# Altium PCB PCB1.PcbDoc
Units mil, origin at the board's own origin, x right, y up, seen from the top; angles counter-clockwise.
Board outline 3937.01 x 2755.91 mil, 2 copper layers (Top Layer, Bottom Layer); 62 components, 55 nets, 259 pads, 42 vias.
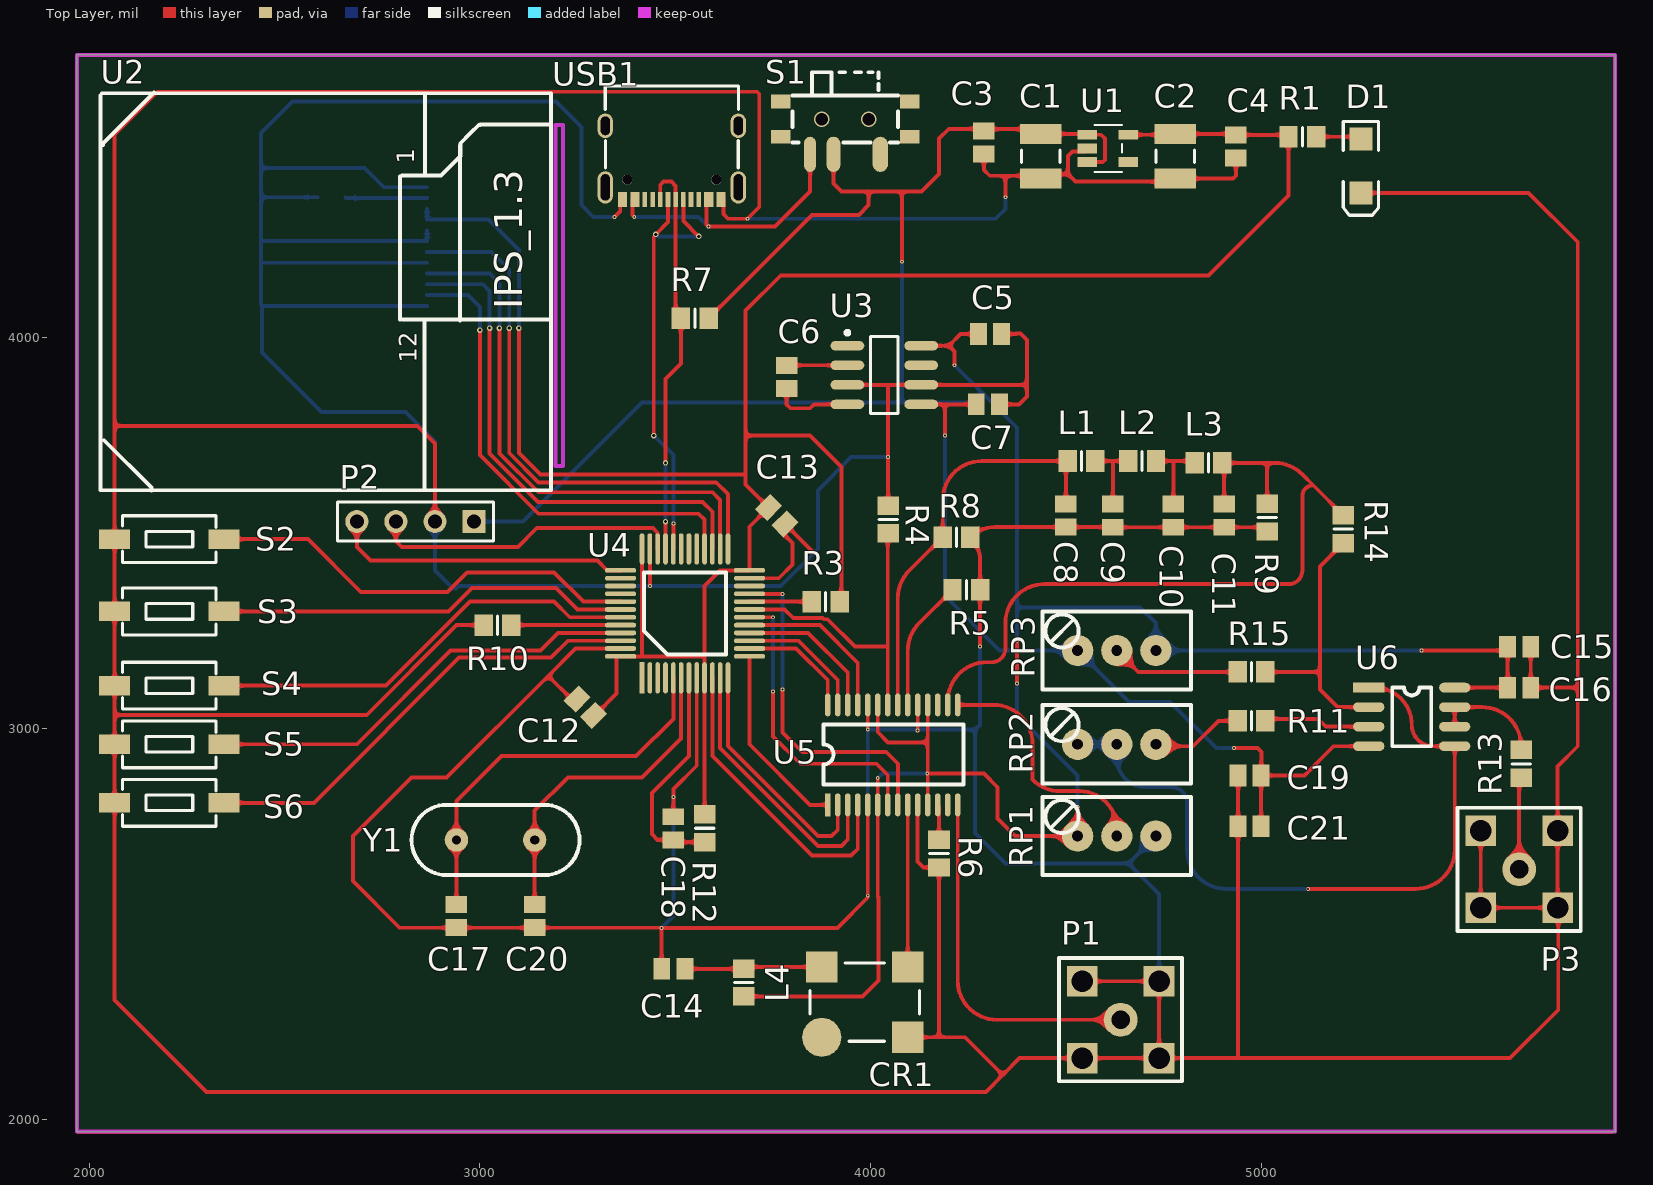
[diagram p0: Top Layer view]
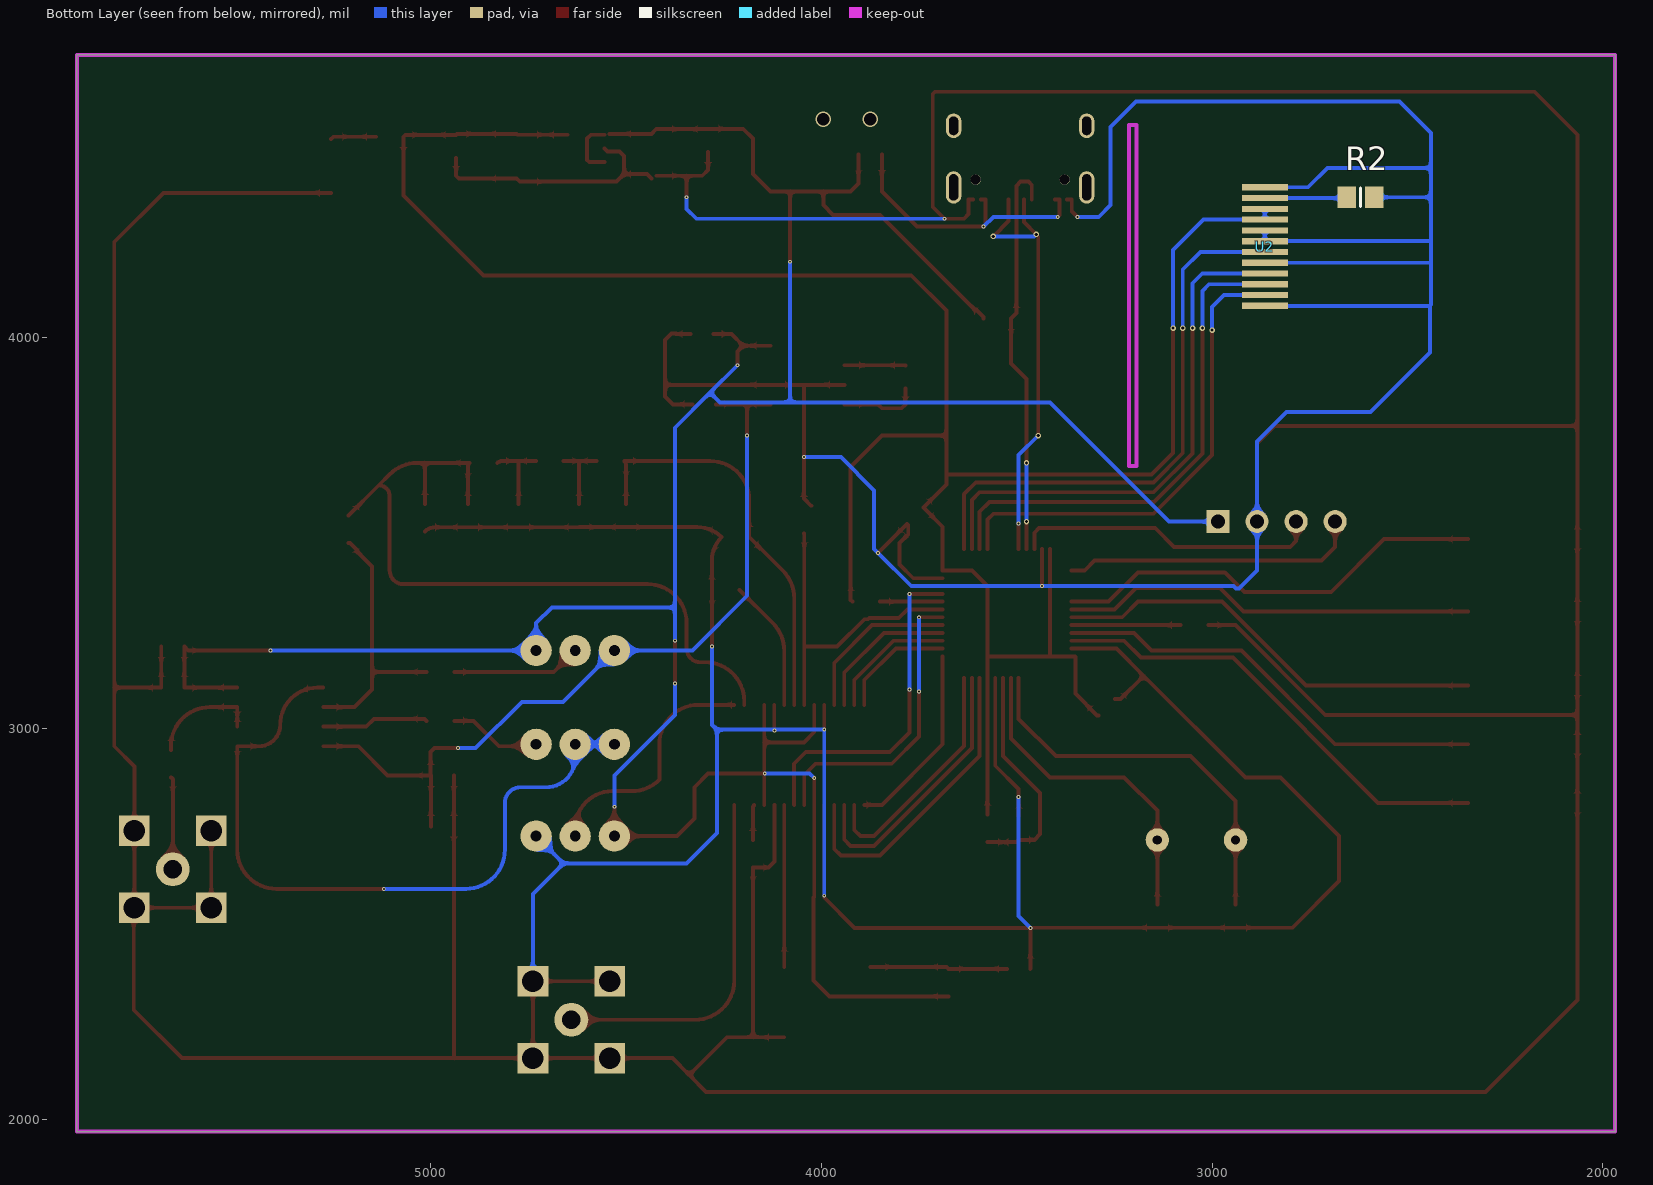
[diagram p1: Bottom Layer view, seen from below]

## Layer stack, top to bottom
Top Solder: solder mask 0.4, Solder Resist, Dk 3.5
Top Layer: signal copper 1.4
Dielectric 1: dielectric 12.6, FR-4, Dk 4.8
Bottom Layer: signal copper 1.4
Bottom Solder: solder mask 0.4, Solder Resist, Dk 3.5

## Board outline
1968.5,1968.5 5905.51,1968.5 5905.51,4724.41 1968.5,4724.41

## Design rules (kind name [scope] priority, off if disabled: settings)
Clearance [All] p1: gap=8 ignorepadtopadclearanceinfootprint=FALSE
PolygonConnect [All] p1: connectstyle=Relief reliefconductorwidth=10 reliefentries=4 polygonreliefangle="90 Angle" airgapwidth=10
RoutingVias [All] p1: holewidth=28 width=50 viastyle="Through Hole" minholewidth=28 minwidth=50 maxholewidth=28 maxwidth=50
SolderMaskExpansion [All] p1: expansion=4 istentingtop=FALSE
Width [All] p1: maxlimit=100 minlimit=10 preferedwidth=10 minimp=50.000000 maximp=50.000000 favimp=50.000000
30 further rules are at their usual default settings.

## Components (designator, comment, footprint, x,y, rotation, side; value= is the part's Value field where it differs from the comment)
C1 "Cap Pol1" C1210_N 4435,4465 r270 top
C2 "Cap Pol1" C1210_N 4780,4465 r270 top
C3 "Cap" C0805 4290,4500 r90 top
C4 "Cap" C0805 4935,4490 r90 top
C5 "Cap" C0805 4305.47,4010 r180 top
C6 "Cap" C0805 3785,3900 r90 top
C7 "Cap" C0805 4300,3830 r180 top
C8 "Cap" C0805 4500,3545.47 r90 top
C9 "Cap" C0805 4620,3545 r90 top
C10 "Cap" C0805 4775,3545 r90 top
C11 "Cap" C0805 4905,3545 r90 top
C12 "Cap" C0805 3270,3055 r315 top
C13 "Cap" C0805 3760,3545 r135 top
C14 "Cap" C0805 3495,2385 r180 top
C15 "Cap" C0805 5660,3210 r0 top
C16 "Cap" C0805 5660,3105 r0 top
C17 "Cap" C0805 2940,2520 r90 top
C18 "Cap" C0805 3495,2745 r270 top
C19 "Cap" C0805 4970,2880 r180 top
C20 "Cap" C0805 3140,2520 r90 top
C21 "Cap" C0805 4970,2750 r180 top
CR1 "30MHZ" CRYSTAL-SMT-5X7 3875,2210 r0 top
D1 "LED2" 3.2X1.6X1.1 5255,4440 r270 top
L1 "Inductor" 6-0805_N 4540,3685 r0 top
L2 "Inductor" 6-0805_N 4695,3685 r0 top
L3 "Inductor" 6-0805_N 4865,3680 r0 top
L4 "Inductor" 6-0805_N 3675,2350 r270 top
P1 "SMA" SMA-KE 4640,2255 r0 top
P2 "Header 4" HDR1X4 2985,3530 r180 top
P3 "SMA" SMA-KE 5660,2640 r0 top
R1 "Res2" 6-0805_N 5105,4515 r180 top
R2 "Res2" 6-0805_N 2620,4360 r180 bottom
R3 "Res2" 6-0805_N 3885,3325 r180 top
R4 "Res2" 6-0805_N 4045,3535 r90 top
R5 "Res2" 6-0805_N 4245,3355 r180 top
R6 "Res2" 6-0805_N 4175,2680 r90 top
R7 "Res2" 6-0805_N 3550,4050 r180 top
R8 "Res2" 6-0805_N 4220,3490 r180 top
R9 "Res2" 6-0805_N 5015,3540 r90 top
R10 "Res2" 6-0805_N 3045,3265 r180 top
R11 "Res2" 6-0805_N 4975,3020 r180 top
R12 "Res2" 6-0805_N 3575,2745 r90 top
R13 "Res2" 6-0805_N 5665,2910 r270 top
R14 "Res2" 6-0805_N 5210,3510.43 r270 top
R15 "Res2" 6-0805_N 4975,3145 r0 top
RP1 "POT2" VR7 4630,2725 r180 top
RP2 "POT2" VR7 4630,2960 r180 top
RP3 "POT2" VR7 4630,3200 r180 top
S1 "SW SPDT" SW-SPDT-7P 3845,4470 r0 top
S2 "KEY" SW-MINI 2085,3485 r0 top
S3 "KEY" SW-MINI 2085,3300 r0 top
S4 "KEY" SW-MINI 2085,3110 r0 top
S5 "KEY" SW-MINI 2085,2960 r0 top
S6 "KEY" SW-MINI 2085,2810 r0 top
U1 "XC6219B332" SOT23-5L 4555,4485 r270 top
U2 "1.3寸TFT液晶" 1.3-TFT-TPS 2864.7,4385.72 r0 top
U3 "ICL7660" SO8_N 4035,3905 r0 top
U4 "STM32F103C8" TQFP-48 3415,3130 r90 top
U5 "AD9851" TSSOP28 3890.28,2805 r90 top
U6 "OPA2690" SO-8 5275,3105 r0 top
USB1 "TYPE-C" TYPE-C 3320.94,4542.8 r0 top
Y1 "XTAL" XTAL2 3040,2715 r180 top

## Footprints (in the part's own frame and the unit in brackets; to place one, negate y for a bottom-side part, rotate by r counter-clockwise, add the part's x,y. Pads: shape width x height; smd on the part's side, far side on the other; paste and mask are expansions set on the pad)
1.3-TFT-TPS [mm]
  rect 3x0.4 smd far side: 1(0,0) 2(0.008,-0.709) 3(0.008,-1.409) 4(0.008,-2.109) 5(0.008,-2.809) 6(0.008,-3.509) 7(0.008,-4.209) 8(0.008,-4.909) 9(0.008,-5.609) 10(0.008,-6.309) 11(0.008,-7.009) 12(0.008,-7.709)
  Keep-Out Layer lines w0.254: 8.339,-18.123 8.339,4.051 8.847,4.051 8.847,-18.123 8.339,-18.123
  silkscreen extent -21.22,-19.72 8.06,6.16
3.2X1.6X1.1 [mm] "SMT LED; 2 Flat Leads"
  rect 1.5x1.5 smd: 1(-1.75,0) 2(1.75,0)
  silkscreen extent -2.9,-1.15 3.2,1.15
6-0805_N [mm]
  rect 1.2x1.4 smd: 1(-0.9,0) 2(0.9,0)
  silkscreen extent 0,-0.6 0,0.6, body extent -1.07,-0.7 1.07,0.7, height 0.7
C0805 [mm]
  rect 1.1x1.4 smd: 1(-0.75,0) 2(0.75,0)
  body extent -1.1,-0.73 1.1,0.72, height 1.4
C1210_N [mm] "Chip Capacitor, Body 3.2x2.5mm, IPC Medium Density"
  rect 1.3x2.7 smd: 1(-1.45,0) 2(1.45,0)
  silkscreen extent -0.4,-1.25 0.4,1.25, body extent -1.7,-1.35 1.7,1.35, height 1.5
CRYSTAL-SMT-5X7 [mil]
  round 100 smd: 1(0,0)
  rect 80x80 smd: 4(220,0) 5(220,180) 8(0,180)
  silkscreen extent -30,-10 250,190
HDR1X4 [mm] "Connector; Header; 4 Position"
  rect 1.5x1.5 hole 0.9: 1(0,0)
  round 1.5 hole 0.9: 2(2.54,0) 3(5.08,0) 4(7.62,0)
  silkscreen extent -1.27,-1.27 8.89,1.27
SMA-KE [mm]
  round 2.2 hole 1.2: 1(0,0)
  rect 2x2 hole 1.4: 2(2.5,2.5) 3(2.5,-2.5) 4(-2.5,-2.5) 5(-2.5,2.5)
  silkscreen extent -4,-4 4,4
SO8_N [mm]
  oval 2.2x0.6 smd: 1(-2.4,1.905) 2(-2.4,0.635) 3(-2.4,-0.635) 4(-2.4,-1.905) 5(2.4,-1.905) 6(2.4,-0.635) 7(2.4,0.635) 8(2.4,1.905)
  silkscreen extent -2.52,-2.5 0.9,2.88, body extent -2,-2.5 2,2.5, height 1.75
SO-8 [mil]
  rect 80x25 smd: 1(0,0)
  oval 80x25 smd: 2(0,-50) 3(0,-100) 4(0,-150) 5(220,-150) 6(220,-100) 7(220,-50) 8(220,0)
  silkscreen extent 60,-150 160,0
SOT23-5L [mil]
  rect 25x50 smd: 1(-35,0) 2(0,0) 3(35,0) 4(35,105) 5(-35,105)
  silkscreen extent -60,18 60,88
SW-MINI [mil]
  rect 80x50 smd: 1(-20,0) 2(260,0)
  silkscreen extent 0,-60 240,60
SW-SPDT-7P [mil]
  oval 30x90 smd: 1(0,0)
  oval 35x90 smd: 2(60,0)
  oval 40x90 smd: 3(180,0)
  rect 50x35 smd: 4(255,45) 5(255,135) 6(-75,135) 7(-75,45)
  silkscreen extent -45,30 225,210
TQFP-48 [mil]
  rect 80x12 smd: 1(0,0)
  oval 80x12 smd: 2(0,-20) 3(0,-40) 4(0,-60) 5(0,-80) 6(0,-100) 7(0,-120) 8(0,-140) 9(0,-160) 10(0,-180) 11(0,-200) 12(0,-220) 25(330,-220) 26(330,-200) 27(330,-180) 28(330,-160) 29(330,-140) 30(330,-120) 31(330,-100) 32(330,-80) 33(330,-60) 34(330,-40) 35(330,-20) 36(330,0)
  oval 12x80 smd: 13(55,-275) 14(75,-275) 15(95,-275) 16(115,-275) 17(135,-275) 18(155,-275) 19(175,-275) 20(195,-275) 21(215,-275) 22(235,-275) 23(255,-275) 24(275,-275) 37(275,55) 38(255,55) 39(235,55) 40(215,55) 41(195,55) 42(175,55) 43(155,55) 44(135,55) 45(115,55) 46(95,55) 47(75,55) 48(55,55)
  silkscreen extent 60,-215 270,-5
TSSOP28 [mm]
  rect 1.5x0.35 smd: 1(0,0)
  oval 1.5x0.35 smd: 2(0,-0.65) 3(0,-1.3) 4(0,-1.95) 5(0,-2.6) 6(0,-3.25) 7(0,-3.9) 8(0,-4.55) 9(0,-5.2) 10(0,-5.85) 11(0,-6.5) 12(0,-7.15) 13(0,-7.8) 14(0,-8.45) 15(6.5,-8.45) 16(6.5,-7.8) 17(6.5,-7.15) 18(6.5,-6.5) 19(6.5,-5.85) 20(6.5,-5.2) 21(6.5,-4.55) 22(6.5,-3.9) 23(6.5,-3.25) 24(6.5,-2.6) 25(6.5,-1.95) 26(6.5,-1.3) 27(6.5,-0.65) 28(6.5,0)
  silkscreen extent 1.33,-8.83 5.23,0.27
TYPE-C [mm]
  round 0.65 hole 0.65: 0(1.435,-3.5) 0(7.215,-3.5)
  oval 1x1.6 hole 0.6 slot 1.2 at 90 deg: 1(0,0) 2(8.65,0)
  oval 1x2.1 hole 0.6 slot 1.7 at 90 deg: 3(8.65,-4) 4(0,-4)
  rect 0.3x1 smd: A1(7.675,-4.79) A4(6.875,-4.79) A5(5.575,-4.79) A6(4.575,-4.79) A7(4.075,-4.79) A8(3.075,-4.79) A9(1.775,-4.79) A12(0.975,-4.79) B1(1.275,-4.79) B4(2.075,-4.79) B5(2.575,-4.79) B6(3.575,-4.79) B7(5.075,-4.79) B8(6.075,-4.79) B9(6.575,-4.79) B12(7.375,-4.79)
  silkscreen extent 0,-2.74 8.65,2.6
VR7 [mil]
  round 80 hole 28: 1(-100,0) 2(100,0) 3(0,0)
  silkscreen extent -190,-100 190,100
XTAL2 [mil]
  round 60 hole 24: 1(-100,0) 2(100,0)
  silkscreen extent -215,-90 215,90

## Part data
C1 C2: "Polarized Capacitor (Radial)", LatestRevisionDate=17-Jul-2002, LatestRevisionNote="Re-released for DXP Platform.", PackageDescription="Polarized Capacitor (Radial); 2 Leads", PackageReference=RB7.6-15, Published=8-Jun-2000, Publisher="Altium Limited"
C3 C4 C5 C6 C7 C8 C9 C10 C11 C12 C13 C14 C15 C16 C17 C18 C19 C20 C21: "Capacitor", LatestRevisionDate=17-Jul-2002, LatestRevisionNote="Re-released for DXP Platform.", PackageDescription="Radial Cap, Thru-Hole; 2 Leads; 0.3 in Pin Spacing", PackageReference=RAD-0.3, Published=8-Jun-2000, Publisher="Altium Limited"
CR1: library part CRYSTAL-DIP8
D1: "Typical RED, GREEN, YELLOW, AMBER GaAs LED", LatestRevisionDate=17-Jul-2002, LatestRevisionNote="Re-released for DXP Platform.", PackageDescription="SM LED; 2 Flat Leads", PackageReference=3.2X1.6X1.1, PackageVersion=Feb-2002, Published=8-Jun-2000, Publisher="Altium Limited"
P2: "Header, 4-Pin", LatestRevisionDate=17-Jul-2002, LatestRevisionNote="Re-released for DXP Platform.", Publisher="Altium Limited"
R1 R2 R3 R4 R5 R6 R7 R8 R9 R10 R11 R12 R13 R14 R15: "Resistor", LatestRevisionDate=17-Jul-2002, LatestRevisionNote="Re-released for DXP Platform.", PackageDescription="Axial Device, Thru-Hole; 2 Leads; 0.4 in Pin Spacing", PackageReference=AXIAL-0.4, Published=8-Jun-2000, Publisher="Altium Limited"
RP1 RP2 RP3: "Potentiometer"
S2 S3 S4 S5 S6: library part SW-PB, "Switch", LatestRevisionDate=17-Jul-2002, LatestRevisionNote="Re-released for DXP Platform.", PackageDescription="Switch; 2 Leads", PackageReference=SPST-2, Published=24-Mar-1999, Publisher="Altium Limited"
U1: library part XC6219
U4: "Flaah:64/RAM:20/IO:36", BOM名称=32位STM单片机, 学习资源=www.ooocke.com, 版权归属=源创客
Y1: "Crystal Oscillator", LatestRevisionDate=17-Jul-2002, LatestRevisionNote="Re-released for DXP Platform.", PackageDescription="Crystal, Thru-Hole; 2 Leads; Body 3.1 x 8.2 mm (Dia.xH)", PackageReference=R38, Published=8-Jun-2000, Publisher="Altium Limited"
L1 L2 L3 L4: Code_IEC=1005, Code_JEITA=0402, LatestRevisionDate=29-May-2009, LatestRevisionNote="IPC-7351 Footprint Added.", PackageDescription="Chip Inductor", PackageReference=0402-A, Published=8-Jun-2000, Publisher="Altium Limited"

## Via types
v1: diameter 10, hole 5, Top Layer to Bottom Layer, 30 vias
v2: diameter 14, hole 8, Top Layer to Bottom Layer, 10 vias
v3: diameter 39.37, hole 31.5, Top Layer to Bottom Layer, 2 vias

## Nets (pads, with @x,y where several pads share a name; then routed paths per layer and width w, separated by ;. In a path a pad name is that pad's centre, name@x,y a point inside that pad or via, vN(x,y) a via of type N, cw(c..) or ccw(c..) an arc to the next point about the centre after c; other vN are vias at no path point)
+5: C1.1 C3.2 C5.2 C15.1 C16.1 L4.2 P2.1 R7.1 RP1.2 RP3.1 S1.2 U1.1 U1.3 U3.8 U5.6 U5.11 U5.18 U5.23 U6.8 | length 8650.6
  Top Layer w10: R7.1 3585.43,4053.94 3604.06,4072.56 3607.99,4072.56 3850.43,4315 3970,4315 3995,4340 3995,4375 ; L4.2 3979.57,2314.57 4020,2355 4020,2567.28 4018.23,2569.06 U5.6 v1(4018.23,2873.23) ; S1.2 3905,4395 3925,4375 3995,4375 ; U5.23 4018.23,2991.77 4045,2965 4146.18,2965 ; v1(4080,4195) 4080,4375 ; U3.8 4200,3980 ; U5.11 v1@4146.18,2885 ; U5.18 4146.18,2965 ; v1(4215,3930) 4215,3965 4200,3980 ; C5.2 4230,4010 4200,3980 ; v1(4375,3115) v1(4375,3225) ; v1(4530,2800) RP1.2 4370,2725 4325,2770 4325,2850 4290,2885 v1@4146.18,2885 ; U1.1@4542.91,4522.09 C1.1 4422.56,4534.53 4290,4534.53 4289.53,4535 4200,4535 4175,4510 4175,4420 4130,4375 4080,4375 ; U1.3 4594.14,4450 4600,4455.86 4600,4510 4590,4520 U1.1 ; v1(5410,3200) 5620.47,3200 C15.1 C16.1 U6.8 ; 3995,4375 4080,4375 ; v1@4146.18,2885 4146.18,2965
  Bottom Layer w10: P2.1 3110,3530 3415,3835 4080,3835 ; v1(4018.23,2873.23) 4030,2885 v1(4145,2885) ; v1(4080,4195) 4080,3835 ; v1(4215,3930) 4285,3860 ; v1(4375,3115) 4375,3035 4530,2880 v1(4530,2800) ; v1(4375,3225) 4375,3310 ; v1(5410,3200) RP3.1 4730,3270 4690,3310 4375,3310 ; 4080,3835 4260,3835 4285,3860 ; 4285,3860 4375,3770 4375,3310
+5VIN: S1.1 USB1.A4 USB1.A9 USB1.B4 USB1.B9 | length 733.6
  Top Layer w10: v1(3395,4310) 3390.83,4314.17 USB1.A9 USB1.B4 ; USB1.A4 USB1.B9 3579.8,4290.2 v1(3585,4285) 3755,4285 3845,4375 S1.1
  Bottom Layer w10: v1(3395,4310) 3560,4310 v1(3585,4285)
-5: C7.2 C19.1 C21.1 RP3.2 U3.5 U6.4 | length 2103.4
  Top Layer w10: U3.5 4190,3830 ; v1(4190,3750) 4190,3830 ; C7.2 4205,3830 4190,3830 ; v1(4930,2950) 4990,2950 5000,2940 5000,2880.47 C19.1 ; C21.1 C19.1 ; U6.4 5185,2955 5110,2880 C19.1
  Bottom Layer w10: v1(4190,3750) 4190,3340 4330,3200 RP3.2 4661.7,3068.3 4766.7,3068.3 4885,2950 v1(4930,2950)
AD9850-D0: U4.10 U5.4 | length 797.7
  Top Layer w10: U4.10 3595,2930 3850,2675 3950,2675 3967.05,2692.05 U5.4
AD9850-D1: U4.11 U5.3 | length 705.4
  Top Layer w10: U4.11 3615,2950 3865,2700 3925,2700 3941.46,2716.46 U5.3
AD9850-D2: U4.12 U5.2 | length 621.6
  Top Layer w10: U4.12 3635,2955.46 3865.46,2725 3900,2725 3915.87,2740.87 U5.2
AD9850-D3: U4.13 U5.1 | length 489.5
  Top Layer w10: U4.13 3690,2960 3845,2805 U5.1
AD9850-D4: U4.14 U5.28 | length 297.1
  Top Layer w10: U4.14 3809.54,3205 3890.28,3124.27 U5.28
AD9850-D5: U4.15 U5.27 | length 330.9
  Top Layer w10: U4.15 3815,3225 3915.87,3124.13 U5.27
AD9850-D6: U4.16 U5.26 | length 376.1
  Top Layer w10: U4.16 3840,3245 3941.46,3143.54 U5.26
AD9850-D7: U4.17 U5.25 | length 424.3
  Top Layer w10: U4.17 3870,3265 3967.05,3167.95 U5.25
D/C: U2.7 U4.25 | length 1442.1
  Top Layer w10: v2(3075,4025) 3075,3705 3150,3630 3605,3630 3635,3600 U4.25
  Bottom Layer w10: U2.7 3030,4220 3075,4175 v2(3075,4025)
D\D\S\R\S\T\: R4.1 U4.19 U5.22 | length 832.3
  Top Layer w10: U4.19 3780,3305 3802,3283 3877.46,3283 3880.46,3280 3890,3280 3960,3210 4043.82,3210 ; U5.22 4043.82,3210 ; R4.1 4043.82,3498.38 4043.82,3210
DDSFQUP: U4.21 U5.8 | length 873.4
  Top Layer w10: U4.21 v1(3775,3345) ; v1(3775,3100) 3775,2990 3825,2940 4040,2940 4070,2910 4070,2805.59 U5.8
  Bottom Layer w10: v1(3775,3100) v1(3775,3345)
DDSWCLK: U4.18 U5.7 | length 775.9
  Top Layer w10: U4.18 v1(3750,3285) ; v1(3750,3095) 3750,2980 3820,2910 4015,2910 4043.82,2881.18 U5.7
  Bottom Layer w10: v1(3750,3095) v1(3750,3285)
FOUT: C11.2 L3.2 R9.2 R14.1 U5.16 | length 1941.8
  Top Layer w10: U5.16 4197.36,3070 cw(c4297.36,3070) 4297.36,3170 4310,3170 ccw(c4310,3205) 4345,3205 4345,3270 cw(c4445,3270) 4445,3370 5070,3370 ccw(c5070,3405) 5105,3405 5105,3595 cw(c5132.93,3595) 5132.93,3622.93 ; C11.2 4905,3668.98 ccw(c4889.41,3668.98) L3.2 5015,3680 ; R9.2 5015,3680 ; R14.1 5132.93,3622.93 ; 5015,3680 5034.45,3680 cw(c5034.45,3580) 5105.16,3650.71 5132.93,3622.93
GND: C1.2 C2.2 C3.1 C4.1 C5.1 C7.1 C8.1 C9.1 C10.1 C11.1 C12.1 C13.1 C14.2 C15.2 C16.2 C17.1 C18.1 C19.2 C20.1 C21.2 CR1.4 D1.2 P1.2 P1.3 P1.4 P1.5 P2.2 P3.2 P3.3 P3.4 P3.5 R2.2 R4.2 R5.1 R6.1 R8.1 R9.1 R10.2 RP1.1 S2.1 S3.1 S4.1 S5.1 S6.1 U1.2 U2.1 U2.5 U2.6 U2.8 U2.12 U3.3 U3.6 U4.8 U4.23 U4.35 U4.47 U5.5 U5.10 U5.19 U5.24 USB1.A1 USB1.A12 USB1.B1 USB1.B12 | length 31450.3
  Top Layer w10: P2.2 2885,3730 2840,3775 2065,3775 ; R10.2 2940.46,3265 2710.46,3035 2065,3035 ; C12.1 3234.12,3075.88 3175,3135 ; v1(3345,4310) 3359.33,4324.33 USB1.A12 USB1.B1 ; U4.47 3245,3205 3175,3135 ; v1(3435,3365) U4.35 ; C14.2 3465,2385.47 v1(3465,2490) ; C18.1 v1(3495,2825) 3495,2845 3555,2905 U4.8 ; USB1.B12 USB1.A1 3623.11,4316.89 3635,4305 v1(3685,4305) 3715,4335 3715,4624.14 3709.14,4630 2175,4630 2065,4520 2065,3775 ; U4.23 3765,3385 3800,3420 3800,3475 3777.66,3497.34 3777.66,3520.9 C13.1 v1(3855,3450) ; U3.3 U3.6 4400,3880 ; U5.5 v1(3992.64,2572.36) 3992.64,2567.64 3915,2490 v1(3465,2490) ; v1(3992.64,2997.36) U5.24 ; R4.2@4025,3570.43 4026.38,3570.43 4045,3589.06 v1(4045,3695) 4045,3875 ; CR1.4 4175,2210 ; v1(4120,2995) 4120.59,2995.59 U5.19 ; U5.10 4120,2804.41 4120,2660 4135.43,2644.57 R6.1 4175,2210 ; v1(4280,3210) 4280,3354.57 R5.1 4280.43,3429.64 ccw(c4195.08,3429.64) R8.1 cw(c4318.07,3427.36) 4318.07,3515.94 C8.1 4618.86,3515.94 cw(c4618.86,3514.33) C9.1 C10.1 C11.1 4988.67,3515.47 cw(c4988.67,3478.24) R9.1 ; C3.1@4290,4475.47 C3.1 4290,4430 4305,4415 4345,4415 ; C7.1 4380,3830 4400,3850 4400,3880 ; C5.1 4371.65,4010 4372.51,4010.86 4384.14,4010.86 4400,3995 4400,3880 ; v1(4345,4360) 4345,4415 ; C1.2@4422.09,4415 4345,4415 ; C1.2 4446.23,4419.14 4505,4419.14 ; P1.5 P1.2 P1.3 ; U1.2 4547.5,4477.5 4516.62,4477.5 4505,4465.88 4505,4419.14 ; C4.1 4935,4415 4927.91,4407.91 C2.2 4772.09,4400 4524.14,4400 4505,4419.14 ; C19.2 C21.2 4940.47,2157.05 4940,2156.57 ; D1.2 5683.9,4371.1 5810,4245 5810,3105 ; P3.5 P3.4 P3.3 ; C15.2 C16.2 5810,3105 ; 2065,3035 S4.1 S3.1 S2.1 2065,3775 ; 2065,3035 S5.1 S6.1 2065,2305 2300,2070 4295,2070 4338.29,2113.29 ; 3175,3135 2915,2875 2825,2875 2675,2725 2675,2610 2794.53,2490.47 C17.1 C20.1 3464.53,2490.47 v1(3465,2490) ; 4175,2210 4241.57,2210 4338.29,2113.29 ; 4338.29,2113.29 4381.57,2156.57 P1.4 P1.3 ; P1.3 4940,2156.57 ; 4940,2156.57 5636.57,2156.57 5760,2280 5760,2540 P3.3 ; P3.3 P3.2 5758.43,2903.43 5810,2955 5810,3105
  Bottom Layer w10: R2.2 2440,4360 ; U2.1 2754.28,4385.72 2705,4435 2440,4435 ; U2.12 2442.8,4082.2 ; U2.8 2442.56,4192.44 2440,4195 ; U2.5 U2.6 2442.44,4247.56 2440,4250 ; v1(3345,4310) 3290,4310 3260,4340 3260,4540 3195,4605 2520,4605 2440,4525 2440,4435 ; v1(3465,2490) 3495,2520 3495,2625 v1(3495,2825) ; v1(3685,4305) 4320,4305 4345,4330 v1(4345,4360) ; v1(3992.64,2572.36) v1(3992.64,2997.36) 4267.64,2997.36 ; v1(4045,3695) 3950,3695 3865,3610 3865,3460 v1(3855,3450) 3770,3365 v1(3435,3365) 2945,3365 2939.14,3359.14 2930.86,3359.14 2885,3405 P2.2 2885,3735 2810,3810 2595,3810 2442.8,3962.2 2442.8,4082.2 ; v1(4280,3210) 4280,3009.72 4267.64,2997.36 ; RP1.1 4660,2655 ; P1.2 4738.43,2576.57 4660,2655 ; 2440,4195 2440,4250 ; 2440,4195 2440,4085 2442.8,4082.2 ; 2440,4250 2440,4360 ; 2440,4360 2440,4435 ; 4267.64,2997.36 4267.64,2732.36 4345,2655 4660,2655
IOUTA: C8.2 L1.1 R8.2 U5.21 | length 1055.8
  Top Layer w10: U5.21 4069.41,3333.42 cw(c4169.41,3333.42) 4098.7,3404.13 R8.2 4184.57,3585 cw(c4284.57,3585) 4284.57,3685 L1.1 ccw(c4515.59,3673.98) 4500,3673.98 C8.2
IOUTB: R5.2 U5.20 | length 337.2
  Top Layer w10: U5.20 4095,3199.01 cw(c4195,3199.01) 4124.29,3269.72 R5.2
KEY1: S2.2 U4.41 | length 1122.7
  Top Layer w10: S2.2 2560,3485 2695,3350 2917.5,3350 2967.5,3400 3190,3400 3265,3325 U4.41
KEY2: S3.2 U4.42 | length 1062.6
  Top Layer w10: S3.2 2920,3300 2980,3360 3195,3360 3250,3305 U4.42
KEY3: S4.2 U4.43 | length 1120.6
  Top Layer w10: S4.2 2760,3110 2975,3325 3190,3325 3230,3285 U4.43
KEY4: S5.2 U4.45 | length 1133.1
  Top Layer w10: S5.2 2685,2960 2925,3200 3155,3200 3200,3245 U4.45
KEY5: S6.2 U4.46 | length 1186.9
  Top Layer w10: S6.2 2575,2810 2947,3182 3182,3182 3225,3225 U4.46
NetC6_1: C6.1 U3.4 | length 204.3
  Top Layer w10: C6.1 3785,3830 3795,3820 3845.16,3820 3855.16,3830 U3.4
NetC6_2: C6.2 U3.2 | length 155.7
  Top Layer w10: C6.2 3785.47,3930 U3.2
NetC9_2: C9.2 L1.2 L2.1 | length 195.3
  Top Layer w10: L1.2 4617.5,3685 ; C9.2 4620,3678.96 ccw(c4611.46,3678.96) 4617.5,3685 ; L2.1 4617.5,3685
NetC10_2: C10.2 L2.2 L3.1 | length 211.2
  Top Layer w10: L2.2 4773.96,3685 ; C10.2 4775,3682.5 ccw(c4771.46,3682.5) 4773.96,3685 ; L3.1 ccw(c4817.49,3667.93) 4817.49,3685 4773.96,3685
NetC14_1: C14.1 CR1.8 L4.1 | length 352.5
  Top Layer w10: C14.1 3674.57,2385 L4.1 3679.57,2390 CR1.8
NetD1_1: D1.1 R1.1 | length 117.1
  Top Layer w10: R1.1 5248.9,4515 D1.1
NetP1_1: P1.1 U5.14 | length 924.1
  Top Layer w10: U5.14 4222.95,2355 ccw(c4322.95,2355) 4322.95,2255 P1.1
NetP3_1: P3.1 R13.2 | length 237.4
  Top Layer w10: P3.1 5660,2869.57 cw(c5665,2869.57) R13.2
NetR2_1: R2.1 U2.2 | length 210.5
  Bottom Layer w10: R2.1 2657.64,4357.79 U2.2
NetR3_2: R3.2 U4.20 | length 159.6
  Top Layer w10: U4.20 R3.2
NetR6_2: R6.2 U5.12 | length 90.4
  Top Layer w10: U5.12 cw(c4163.98,2797.21) 4175,2797.21 R6.2
NetR10_1: R10.1 U4.44 | length 279.6
  Top Layer w10: R10.1 U4.44
NetR11_1: R11.1 U6.3 | length 274.9
  Top Layer w10: R11.1 5015.43,3025 5145,3025 5165,3005 U6.3
NetR11_2: R11.2 RP2.1 | length 248.6
  Top Layer w10: RP2.1@4740,2960 RP2.1 4735,2955 4825,2955 4890,3020 R11.2
NetR13_1: R13.1 U6.6 U6.7 | length 286.6
  Top Layer w10: U6.6 U6.7 5565,3055 cw(c5565,2955) 5665,2955 R13.1
NetR14_2: R14.2 R15.2 U6.2 | length 685.4
  Top Layer w10: R15.2 5150,3145 ; R14.2 5206.06,3475 5187.44,3456.38 5187.44,3452.44 5150,3415 5150,3145 ; U6.2 5195,3055 5150,3100 5150,3145
NetR15_1: R15.1 RP3.3 | length 332.3
  Top Layer w10: RP3.3 4685,3145 R15.1
NetRP1_3: RP1.3 U5.15 | length 637.8
  Top Layer w10: U5.15 4314.57,3060.91 cw(c4314.57,2960.91) 4414.57,2960.91 4414.57,2869.29 ccw(c4485.28,2940) 4485.28,2840 4535,2840 cw(c4535,2745) 4630,2745 RP1.3
NetRP2_2: RP2.2 RP2.3 U6.1 U6.5 | length 1870.4
  Top Layer w10: v1(5120,2590) 5395,2590 ccw(c5395,2690) 5495,2690 U6.5 5440,2955 cw(c5440,3010) 5385,3010 ccw(c5290,3010) 5290,3105 U6.1
  Bottom Layer w10: RP2.2 RP2.3 4630,2925 ccw(c4705,2925) 4705,2850 4770,2850 cw(c4770,2810) 4810,2810 4810,2690 ccw(c4910,2690) 4910,2590 v1(5120,2590)
NRST: C18.2 R12.1 U4.7 | length 582.8
  Top Layer w10: U4.7 3535,2930 3440,2835 3440,2730 3454.53,2715.47 C18.2 3500.91,2709.57 R12.1
OSC-IN: C17.2 U4.5 Y1.2 | length 1012.5
  Top Layer w10: C17.2 Y1.2 2940,2815 3055,2930 3400,2930 3495,3025 U4.5
OSC-OUT: C20.2 U4.6 Y1.1 | length 847.1
  Top Layer w10: C20.2 Y1.1 3140,2790 3225,2875 3415,2875 3515,2975 U4.6
R\E\S\: U2.11 U4.28 | length 1245.4
  Top Layer w10: v2(3000,4020) 3000,3700 3150,3550 3560,3550 3575,3535 U4.28
  Bottom Layer w10: U2.11 2969.76,4109.76 3000,4079.53 v2(3000,4020)
SCL: U2.9 U4.26 | length 1370.3
  Top Layer w10: v2(3050,4025) 3050,3704.54 3149.54,3605 3595,3605 3615,3585 U4.26
  Bottom Layer w10: U2.9 3025.12,4164.88 3050,4140 v2(3050,4025)
SCLK: P2.4 U4.37 | length 764.9
  Top Layer w10: P2.4 2685,3465 2720,3430 3301,3430 3326,3405 U4.37
SDA: U2.10 U4.27 | length 1309.8
  Top Layer w10: v2(3025,4025) 3025,3704.09 3149.09,3580 3570,3580 3595,3555 U4.27
  Bottom Layer w10: U2.10 3007.68,4137.32 3025,4120 v2(3025,4025)
SDIO: P2.3 U4.34 | length 792
  Top Layer w10: P2.3 2785,3480 2800,3465 3097.43,3465 3145.43,3513 3442.87,3513 3454.62,3501.25 3454.62,3460.38 U4.34
SYSCLK: CR1.5 U5.9 | length 415
  Top Layer w10: CR1.5 U5.9
USB-D-N: U4.32 USB1.A7 USB1.B7 | length 1152.5
  Top Layer w10: v2(3445,3750) 3445,4258.92 3450,4263.92 v2(3450,4265) 3481.38,4296.38 USB1.A7 ; U4.32 v1(3495,3525) ; USB1.B7 3520.75,4299.25 v2(3560,4260)
  Bottom Layer w10: v2(3445,3750) 3495,3700 v1(3495,3525) ; v2(3450,4265) 3451.08,4265 3456.08,4260 v2(3560,4260)
USB-D-P: R7.2 U4.33 USB1.A6 USB1.B6 | length 1035.8
  Top Layer w10: USB1.B6 3461.69,4391.69 3470,4400 3490,4400 3501.06,4388.94 USB1.A6 3501.06,4063.5 R7.2 3514.57,3934.57 3475,3895 v2(3475,3680) ; U4.33 v2(3475,3530)
  Bottom Layer w10: v2(3475,3530) v2(3475,3680)
VCC: C2.1 C4.2 C12.2 C13.2 R1.2 R3.1 R12.2 U1.5 U2.3 U2.4 U4.9 U4.24 U4.36 U4.48 | length 6230.4
  Top Layer w10: v2(3100,4025) 3100,3705.46 3155.23,3650.23 3679.77,3650.23 3680,3650 ; C12.2 3294.12,3034.12 3350,3090 3350,3184.08 3350.92,3185 U4.48 3415,3185 ; U4.36 3415,3185 ; R12.2 U4.9 3575,3185 ; R3.1 3925,3329.57 3925,3670 3845,3750 3680,3750 ; U1.5@4650,4520 4777.91,4520 C2.1 4932.44,4522.09 C4.2 5065.04,4519.53 R1.2 5069.57,4364.57 4865,4160 3770,4160 3680,4070 3680,3750 ; 3415,3185 3575,3185 ; 3575,3185 3575,3365 3615,3405 U4.24 3690,3516.76 C13.2 3680,3625 3680,3650 ; 3680,3650 3680,3750
  Bottom Layer w10: U2.3 U2.4 3022.32,4302.68 3100,4225 v2(3100,4025)
pads on no net: CR1.1 S1.3 S1.4 S1.5 S1.6 S1.7 U1.4 U3.1 U3.7 U4.1 U4.2 U4.3 U4.4 U4.22 U4.29 U4.30 U4.31 U4.38 U4.39 U4.40 U5.13 U5.17 USB1.0 USB1.1 USB1.2 USB1.3 USB1.4 USB1.A5 USB1.A8 USB1.B5 USB1.B8
copper on no net:
  other v3: 3875,4560 3995,4560

## Polygon pours and split planes (outlines as drawn)
GND on Top Layer "NONET_L01_P000" (solid, remove dead copper, shelved, pour order 0): 1970,4725 1970,1965 5900,1965 5905,1970 5905,4720 1975,4720

## Keep-outs
Keep-Out Layer:
  the board outline again, w10

## Text inside footprints (layer, text, board x,y; h text height)
U2: Top Overlay "12" at 2839,3936.2 h45 r90; Top Overlay "1" at 2832,4445.2 h45 r90; Top Overlay "IPS_1.3" at 3108,4073.2 h71.81 r90